# EAGLE board SC_Detect (EAGLE 6.5.0)
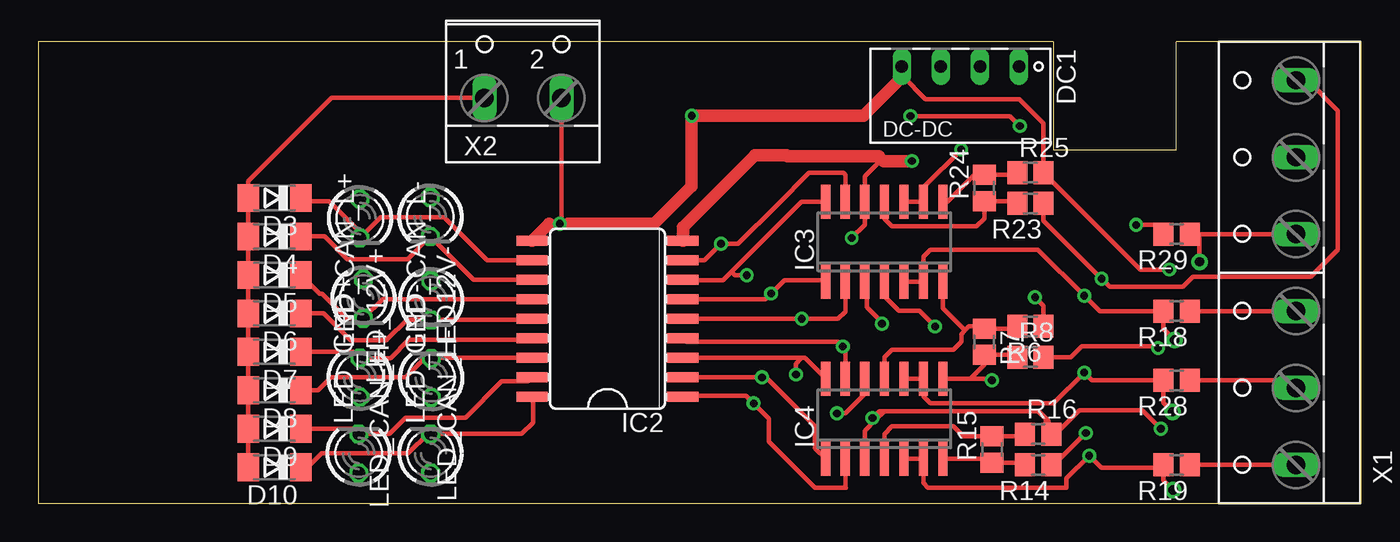
[diagram p0: board, top side]
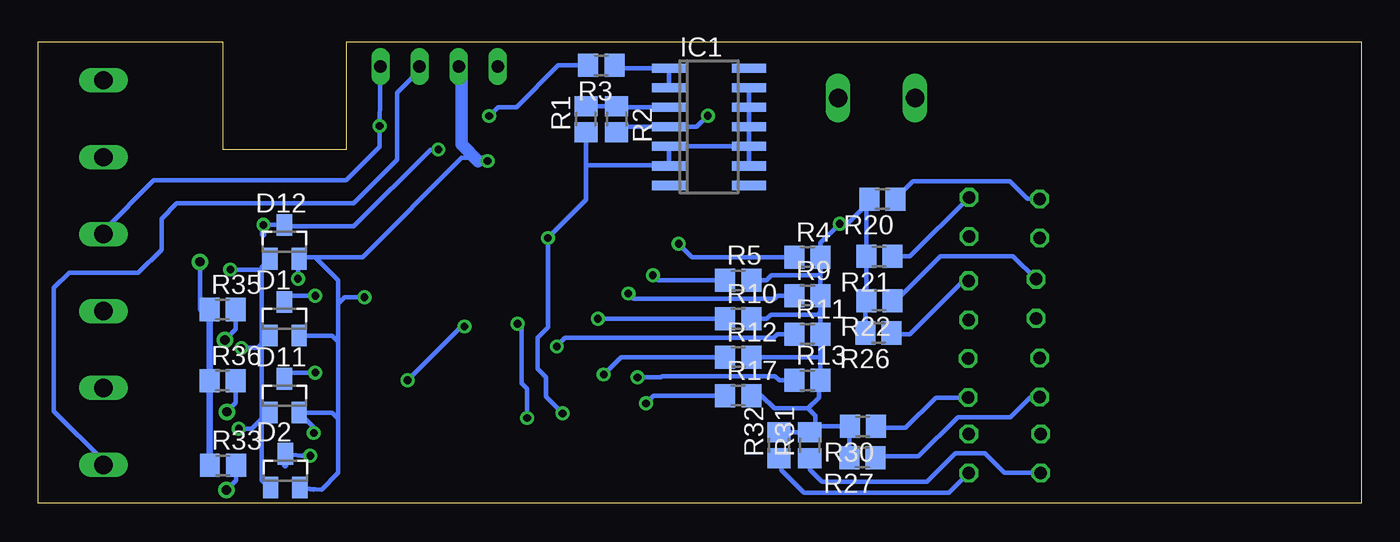
[diagram p1: board, bottom side, seen from below]

Size 86 x 30 mm. Coordinates in mm from the lower left corner, seen from the top.
Outline: 0,30 0,0 86,0 86,30 74,30 74,23 66,23 66,30 0,30
Copper layers (1*16): Top 0.035mm / dielectric 1.5mm / Bottom 0.035mm
Design rules "PCB-POOL Standard": minimum track width 0.15mm, minimum drill 0.3mm, track to track 0.15mm, track to pad 0.15mm, pad to pad 0.15mm, via to via 0.15mm, smd to smd 0.15mm, copper to edge 0.3mm, drill to drill 0.2mm, minimum pad ring 0.2mm, minimum via ring 0.15mm, stop-mask expansion 0.075mm, vias tented up to drill 0mil, thermal gap 0.2mm

## Footprints (pad centres in the part's own frame; a part is rotated, then mirrored left to right if it is on the bottom)
SOT23 = smd 1 x 1.4: 1 -0.95,-1.1; 2 0.95,-1.1; 3 0,1.1
SOD80C = smd 1.4 x 1.8: A 1.7,0; C -1.7,0
NME = drill 0.813 long: 1 0,3.81; 2 0,1.27; 3 0,-1.27; 4 0,-3.81
SO14 = smd 0.6 x 2.2: 1 -3.81,-2.6; 2 -2.54,-2.6; 3 -1.27,-2.6; 4 0,-2.6; 5 1.27,-2.6; 6 2.54,-2.6; 7 3.81,-2.6; 8 3.81,2.6; 9 2.54,2.6; 10 1.27,2.6; 11 0,2.6; 12 -1.27,2.6; 13 -2.54,2.6; 14 -3.81,2.6
SO18L = smd 0.66 x 2.032: 1 -5.08,-4.902; 2 -3.81,-4.902; 3 -2.54,-4.902; 4 -1.27,-4.902; 5 0,-4.902; 6 1.27,-4.902; 7 2.54,-4.902; 8 3.81,-4.902; 9 5.08,-4.902; 10 5.08,4.902; 11 3.81,4.902; 12 2.54,4.902; 13 1.27,4.902; 14 0,4.902; 15 -1.27,4.902; 16 -2.54,4.902; 17 -3.81,4.902; 18 -5.08,4.902
LED3MM = drill 0.813 octagon: A -1.27,0; K 1.27,0
R0805 = smd 1.3 x 1.5: 1 -0.85,0; 2 0.85,0
W237-136 = drill 1.194 long: 1 -12.5,-1.27; 2 -7.5,-1.27; 3 -2.5,-1.27; 4 2.5,-1.27; 5 7.5,-1.27; 6 12.5,-1.27
W237-102 = drill 1.194 long: 1 -2.5,-1.27; 2 2.5,-1.27

## Placement (x,y rotation side)
D1  BAT54S SMD  [SOT23]  70,12 0 bottom
D2  BAT54S SMD  [SOT23]  69.95,2.12 0 bottom
D3  1N4148  [SOD80C]  15.35,19.85 180 top
D4  1N4148  [SOD80C]  15.35,17.35 180 top
D5  1N4148  [SOD80C]  15.35,14.85 180 top
D6  1N4148  [SOD80C]  15.35,12.35 180 top
D7  1N4148  [SOD80C]  15.35,9.85 180 top
D8  1N4148  [SOD80C]  15.35,7.35 180 top
D9  1N4148  [SOD80C]  15.35,4.85 180 top
D10  1N4148  [SOD80C]  15.35,2.35 180 top
D11  BAT54S SMD  [SOT23]  70,7 0 bottom
D12  BAT54S SMD  [SOT23]  70,17 0 bottom
DC1  12V/12V  [NME]  59.95,28.4 270 top
IC1  LM324D  [SO14]  42.4,24.48 270 bottom
IC2  [SO18L]  37,12 90 top
IC3  LM339D  [SO14]  55,17 0 top
IC4  LM339D  [SO14]  55,5.5 0 top
LED12V-  LED_3MM_ST_RT  [LED3MM]  25.48,18.62 270 top
LED_12V+  LED_3MM_ST_RT  [LED3MM]  20.9,18.52 270 top
LED_CAN_H+  LED_3MM_ST_RT  [LED3MM]  21.12,13.3 270 top
LED_CAN_H-  LED_3MM_ST_RT  [LED3MM]  25.52,13.2 270 top
LED_CAN_L+  LED_3MM_ST_RT  [LED3MM]  20.9,8.18 90 top
LED_CAN_L-  LED_3MM_ST_RT  [LED3MM]  25.55,8.15 90 top
LED_GND+  LED_3MM_ST_RT  [LED3MM]  20.82,3.25 90 top
LED_GND-  LED_3MM_ST_RT  [LED3MM]  25.5,3.25 90 top
R1  4k7  [R0805]  50.4,24.98 90 bottom
R2  18k  [R0805]  48.4,24.98 270 bottom
R3  100k  [R0805]  49.4,28.48 180 bottom
R4  10k  [R0805]  36,16 0 bottom
R5  10k  [R0805]  40.5,14.5 0 bottom
R6  3k9  [R0805]  64.5,11.5 180 top
R7  10k  [R0805]  61.5,10.5 270 top
R8  10k  [R0805]  64.5,9.5 0 top
R9  10k  [R0805]  36,13.5 0 bottom
R10  10k  [R0805]  40.5,12 0 bottom
R11  10k  [R0805]  36,11 0 bottom
R12  10k  [R0805]  40.5,9.5 0 bottom
R13  10k  [R0805]  36,8 0 bottom
R14  15k  [R0805]  65,2.5 180 top
R15  3k9  [R0805]  62,3.5 90 top
R16  4k7  [R0805]  65,4.5 0 top
R17  10k  [R0805]  40.5,7 0 bottom
R18  100k  [R0805]  74,12.5 180 top
R19  100k  [R0805]  74,2.5 180 top
R20  2k7  [R0805]  31.12,19.77 180 bottom
R21  2k7  [R0805]  31.32,16.05 180 bottom
R22  2k7  [R0805]  31.32,13.18 180 bottom
R23  3k9  [R0805]  64.5,19.5 180 top
R24  2k2  [R0805]  61.5,20.5 90 top
R25  18k  [R0805]  64.5,21.5 0 top
R26  2k7  [R0805]  31.38,11.07 180 bottom
R27  2k7  [R0805]  32.42,2.98 180 bottom
R28  100k  [R0805]  74,8 180 top
R29  100k  [R0805]  74,17.5 180 top
R30  2k7  [R0805]  32.4,5 180 bottom
R31  2k7  [R0805]  35.85,3.77 90 bottom
R32  2k7  [R0805]  37.85,3.77 90 bottom
R33  100k  [R0805]  74,2.48 0 bottom
R35  100k  [R0805]  74.03,12.6 0 bottom
R36  100k  [R0805]  74.03,7.97 0 bottom
X1  [W237-136]  80.5,15 90 top
X2  [W237-102]  31.5,27.62 0 top

## Library data of the parts
D1-D12 = diode
DC1 = dc-dc-converter
IC1 IC3 IC4 = linear
IC2 = uln-udn
LED12V- LED_12V+ LED_CAN_H+ LED_CAN_H- LED_CAN_L+ LED_CAN_L- LED_GND+ LED_GND- = led
R1-R33 R35 R36 = rcl
X1 X2 = con-wago-500

## Nets
1,96V: IC3.7 IC4.11 R6.2 R7.1
1,941V: IC3.11 R23.2 R24.1
2,484V: IC1.3 R1.2 R2.1
3,04V: IC3.8 R24.2 R25.1
3,98V: IC3.4 IC4.8 R7.2 R8.1
7,62V: IC4.7 R14.2 R15.1
9,61V: IC4.4 R15.2 R16.1
12V+: IC2.1 IC4.2 R17.1
12V+1: D10.C IC2.18 LED_GND-.K
12V-: IC2.2 IC4.1 R13.1
+12V: DC1.2 R19.1 X1.1
BUZZER: D3.A D4.A D5.A D6.A D7.A D8.A D9.A D10.A X2.1
CAN_H: R28.1 X1.2
CAN_H+: IC2.3 IC4.14 R12.1
CAN_H-: IC2.4 IC4.13 R11.1
CAN_L: R18.1 X1.3
CAN_L+: IC2.5 IC3.2 R10.1
CAN_L-: IC2.6 IC3.1 R9.1
GND: DC1.1 R3.2 R29.1 R33.1 R35.1 R36.1 X1.4
GND+: IC2.7 IC3.14 R5.1
GND-: IC2.8 IC3.13 R4.1
GNDINT: D1.2 D2.2 D11.2 D12.2 DC1.3 IC1.5 IC1.6 IC1.9 IC1.10 IC1.11 IC1.12 IC1.13 IC2.9 IC3.12 IC4.12 R1.1 R6.1 R14.1 R23.1 X1.6
N$1: IC1.1 IC1.2 R3.1
N$2: LED_GND-.A R32.1
N$3: LED_GND+.A R31.1
N$4: LED_CAN_L-.A R30.1
N$5: LED_CAN_L+.A R27.1
N$6: LED_CAN_H-.A R26.1
N$8: LED_CAN_H+.A R22.1
N$9: LED12V-.A R21.1
N$10: D12.3 IC3.9 IC3.10 R29.2
N$11: D11.3 IC4.9 IC4.10 R28.2 R36.2
N$12: LED_12V+.A R20.1
N$14: D3.C IC2.11 LED_12V+.K
N$15: D4.C IC2.12 LED12V-.K
N$16: D2.3 IC4.5 IC4.6 R19.2 R33.2
N$17: D5.C IC2.13 LED_CAN_H+.K
N$18: D6.C IC2.14 LED_CAN_H-.K
N$19: D7.C IC2.15 LED_CAN_L+.K
N$20: D8.C IC2.16 LED_CAN_L-.K
N$21: D9.C IC2.17 LED_GND+.K
N$23: D1.3 IC3.5 IC3.6 R18.2 R35.2
VCCINT: D1.1 D2.1 D11.1 D12.1 DC1.4 IC1.4 IC2.10 IC3.3 IC4.3 R2.2 R4.2 R5.2 R8.2 R9.2 R10.2 R11.2 R12.2 R13.2 R16.2 R17.2 R20.2 R21.2 R22.2 R25.2 R26.2 R27.2 R30.2 R31.2 R32.2 X2.2

## Tracks (layer width: path | path; a pad name or v marks a point on that pad's centre or on a via)
1,96V
  Top 0.305: R6.2 63.5,11.35 R7.1 61.35,11.5 60.5,11.5 60.25,11.25 | IC4.11 55,9.5 55.5,10 59.5,10 60,10.5 60,11 60.25,11.25 | IC3.7 58.81,12.69 60.25,11.25
1,941V
  Top 0.305: IC3.11 55,18.5 55.5,18 61,18 61.5,18.5 R24.1 63.5,19.65 R23.2
2,484V
  Bottom 0.305: IC1.3 48.32,25.75 R2.1 R1.2
3,04V
  Top 0.305: IC3.8 59.1,19.6 61,21.5 61.35,21.5 R24.2 63.5,21.35 R25.1
3,98V  (via drill 0.5 pad 0.3)
  Top 0.305: R8.1 63.5,9.65 R7.2 61.5,9 60.6,8.1 IC4.8 61.9,8.1 v62,8 | IC3.4 55,13.47 55.95,12.53 57.27,12.53 v58.3,11.5
  Bottom 0.305: v58.3,11.5 58.5,11.5 v62,8
7,62V
  Top 0.305: R14.2 64,2.65 R15.1 61.75,2.9 IC4.7
9,61V
  Top 0.305: R16.1 64,4.35 R15.2 60.15,4.35 59.5,5 55.5,5 55,4.5 IC4.4
12V+  (via drill 0.5 pad 0.3)
  Top 0.305: IC4.2 52.46,1.04 52.5,1 50.5,1 47.5,4 47.5,5.5 46.75,6.25 | 46.75,6.25 v46.5,6.5 | v46.5,6.5 46,7 41.98,7 IC2.1 | v46.5,6.5 46.75,6.25
  Bottom 0.305: R17.1 46,7 v46.5,6.5
12V+1
  Top 0.305: IC2.18 32.15,6.87 32.15,5.25 31.42,4.52 LED_GND-.K 25.32,4.52 24.05,3.25 18.4,3.25 17.5,2.35 D10.C
12V-  (via drill 0.5 pad 0.3)
  Top 0.305: IC2.2 v47.05,8.19 | v47.05,8.19 47.31,8.19 | 47.31,8.19 47.55,7.95 | 47.55,7.95 50.5,5 50.5,3.59 IC4.1 | v47.05,8.19 47.31,8.19 | 47.31,8.19 47.55,7.95
  Bottom 0.305: R13.1 37.83,8 38.1,8.28 45.44,8.28 45.52,8.19 v47.05,8.19
+12V
  Top 0.305: R19.1 81.5,2.5 X1.1
  Bottom 0.305: X1.1 81.77,2.77 85,6 85,14 84,15 79.5,15 78,16.5 78,18.5 77,19.5 65.5,19.5 62.67,22.32 62.67,26.68 61.27,28.08 DC1.2
BUZZER
  Top 0.305: D10.A D9.A D8.A D7.A D6.A D5.A | D5.A 13.65,15.2 13.8,15.35 13.8,15 D5.A | D5.A 13.65,16.77 13.62,16.8 13.62,17.32 D4.A D3.A 13.65,20.95 19.05,26.35 X2.1
CAN_H
  Top 0.305: R28.1 81.5,8 X1.2
CAN_H+  (via drill 0.5 pad 0.3)
  Top 0.305: IC2.3 49.62,9.46 | 49.62,9.46 49.83,9.46 IC4.14 | v49.25,8.38 49.25,9.09 49.62,9.46
  Bottom 0.305: R12.1 48.12,9.5 v49.25,8.38
CAN_H-  (via drill 0.5 pad 0.3)
  Top 0.305: IC4.13 52.46,10.04 v52.3,10.2 | v52.3,10.2 52.06,10.44 | 52.06,10.44 52,10.5 42.13,10.5 IC2.4 | v52.3,10.2 52.06,10.44
  Bottom 0.305: R11.1 37.95,11 38.2,10.75 51.75,10.75 v52.3,10.2
CAN_L
  Top 0.305: R18.1 81.5,12.5 X1.3
CAN_L+  (via drill 0.5 pad 0.3)
  Top 0.305: IC3.2 52.46,12.46 52,12 50.05,12 | 50.05,12 v49.62,12 | v49.62,12 IC2.5 | v49.62,12 50.05,12
  Bottom 0.305: R10.1 v49.62,12
CAN_L-  (via drill 0.5 pad 0.3)
  Top 0.305: IC2.6 47.27,13.27 v47.64,13.64 | v47.64,13.64 47.79,13.79 | 47.79,13.79 48.5,14.5 51.09,14.5 IC3.1 | v47.64,13.64 47.79,13.79
  Bottom 0.305: R9.1 37.95,13.5 38.15,13.3 47.3,13.3 v47.64,13.64
GND  (via drill 0.5 pad 0.3, 0.6)
  Top 0.305: R29.1 75.47,17.5 | 75.47,17.5 81.5,17.5 X1.4 | v56.7,25.18 63.16,25.18 v63.81,24.52 | v75.5,15.7 75.47,15.7 75.47,17.5
  Bottom 0.305: 63.81,24.25 63.81,23.19 66,21 78.5,21 81.77,17.73 X1.4 | 63.81,24.25 v63.81,24.52 | v63.81,24.52 DC1.1 | R3.2 52.2,28.48 54.92,25.75 56.12,25.75 v56.7,25.18 | v63.81,24.52 63.81,24.25 | R35.1 75.5,12.6 v75.5,15.7
  Bottom 0.406: R33.1 74.88,2.48 R36.1 R35.1 74.85,12.6
GND+  (via drill 0.5 pad 0.3)
  Top 0.305: IC3.14 49.6,19.6 45.06,15.06 | 45.06,15.06 44.5,14.5 41.94,14.5 IC2.7 | v46.05,14.82 45.3,14.82 45.06,15.06
  Bottom 0.305: R5.1 45.73,14.5 v46.05,14.82
GND-  (via drill 0.5 pad 0.3)
  Top 0.305: IC2.8 43.31,15.81 44.34,16.84 | 44.34,16.84 v44.38,16.88 | 52.5,19.64 IC3.13 52.46,21.36 52.35,21.48 50.1,21.48 48.05,19.43 45.5,16.88 v44.38,16.88 | v44.38,16.88 44.34,16.84
  Bottom 0.305: R4.1 43.5,16 v44.38,16.88
GNDINT  (via drill 0.5 pad 0.3)
  Top 0.305: v52.88,17.25 53.73,18.11 IC3.12 53.73,21.25 54.73,22.25 54.98,22.25 54.65,22.57 | v51.92,5.85 52.48,5.85 53.77,7.15 53.77,8.05 IC4.12 | R14.1 66.03,2.5 v68.1,4.58 | R23.1 65.35,18.38 v69.12,14.6 69.65,14.07 74.42,14.07 75.08,14.72 82.72,14.72 84.5,16.5 84.5,25.52 82.53,27.5 82.22,27.5 X1.6 | R6.1 65.35,12.85 v64.8,13.4 | 56.67,22.25 v56.8,22.25 56.67,22.25
  Top 0.813: 54.98,22.25 56.67,22.25 | 54.65,22.57 48.7,22.57 48.65,22.62 46.58,22.62 41.9,17.95 IC2.9
  Bottom 0.305: IC1.5 IC1.6 | IC1.5 45,21.98 50.4,21.98 | 50.4,21.98 R1.1 | IC1.5 IC1.10 | IC1.9 IC1.10 | IC1.10 IC1.11 IC1.12 IC1.13 | 68.1,0.9 D2.2 67.6,0.9 66.5,2 66.5,5.5 | 66.5,5.5 66.5,10.5 | 66.5,10.5 66.5,12.97 | 66.5,12.97 66.5,14.5 68,16 | 68,16 68.95,16 D12.2 69.12,15.82 v69.12,14.6 | D1.2 66.9,10.9 66.5,10.5 | 66.5,5.5 66.9,5.9 D11.2 68.1,4.95 v68.1,4.58 | v51.92,5.85 53,6.92 53,8.2 53.55,8.75 53.55,10.78 52.88,11.45 v52.88,17.25 50.4,19.73 50.4,21.98 | 68,16 64.92,16 58.48,22.45 57,22.45 v56.8,22.25 57.4,22.25 | 58.5,28.27 DC1.3 | v64.8,13.4 66.08,13.4 66.5,12.97
  Bottom 0.813: 57.4,22.25 58.5,23.35 58.5,28.27
N$1
  Bottom 0.305: R3.1 48.55,28.29 IC1.1 IC1.2
N$2
  Bottom 0.305: R32.1 37.77,2.92 37.7,2.85 37.7,2.15 36.23,0.68 26.8,0.68 LED_GND-.A
N$3
  Bottom 0.305: LED_GND+.A 23.18,1.98 24.45,3.25 26.38,3.25 28.23,1.4 35.05,1.4 35.85,2.2 R31.1
N$4
  Bottom 0.305: LED_CAN_L-.A 27.64,6.88 29.62,4.9 31.45,4.9 R30.1
N$5
  Bottom 0.305: LED_CAN_L+.A 21.5,6.91 22.8,5.6 26.23,5.6 28.77,3.05 31.5,3.05 R27.1
N$6
  Bottom 0.305: LED_CAN_H-.A 25.86,14.47 29.32,11 30.45,11 R26.1
N$8
  Bottom 0.305: R22.1 30.25,13.18 27.35,16.07 22.63,16.07 LED_CAN_H+.A
N$9
  Bottom 0.305: R21.1 29.32,16.05 LED12V-.A
N$10  (via drill 0.5 pad 0.3)
  Top 0.305: IC3.10 IC3.9 57.54,20.54 v60,23 | R29.2 72.55,18.1 v71.38,18.1
  Bottom 0.305: v60,23 60.5,23 65.5,18 68,18 69.9,18 D12.3 v71.38,18.1
  Bottom 0.406: 71.38,17.48 v71.38,18.1
N$11  (via drill 0.5 pad 0.3, 0.6)
  Top 0.305: IC4.10 IC4.9 57.54,6.96 58,6.5 66,6.5 v68,8.5 68.5,8 R28.2 73.15,6.55 v73.75,5.95
  Bottom 0.305: v68,8.5 69.6,8.5 D11.3 | R36.2 73.17,6.53 v73.75,5.95
  Bottom 0.406: 70,7.97 D11.3
N$12
  Bottom 0.305: LED_12V+.A 21.7,19.8 22.82,20.93 29.12,20.93 R20.1
N$14
  Top 0.305: IC2.11 29.16,15.81 26.38,18.6 22.25,18.6 LED_12V+.K 20.9,17.62 18.9,19.62 17.27,19.62 D3.C
N$15
  Top 0.305: IC2.12 28.29,14.54 LED12V-.K 24,15.88 20.07,15.88 18.6,17.35 D4.C
N$16  (via drill 0.5 pad 0.3, 0.6)
  Top 0.305: IC4.5 IC4.6 57.54,1.33 57.85,1.02 66.85,1.02 66.85,1.62 v68.33,3.1 69.1,2.33 72.97,2.33 R19.2 73.15,1.5 v73.78,0.88
  Bottom 0.305: D2.3 68.92,3.1 v68.33,3.1 | R33.2 73.15,1.5 v73.78,0.88
  Bottom 0.406: 69.95,2.48 D2.3
N$17
  Top 0.305: IC2.13 22.36,13.27 LED_CAN_H+.K 20.05,12.03 18.45,13.62 18.27,13.62 D5.C
N$18
  Top 0.305: IC2.14 32.03,11.93 LED_CAN_H-.K 23.95,11.93 22.65,10.62 22.62,10.6 20.3,10.6 18.55,12.35 D6.C
N$19
  Top 0.305: IC2.15 31.99,10.62 24.07,10.62 22.89,9.45 LED_CAN_L+.K 20.5,9.85 D7.C
N$20
  Top 0.305: IC2.16 25.59,9.46 LED_CAN_L-.K 25.09,9.42 23.88,8.2 19.02,8.2 18.18,7.35 D8.C
N$21
  Top 0.305: IC2.17 31.83,7.92 30.12,7.92 27.77,5.58 23.88,5.58 22.82,4.52 LED_GND+.K 20.5,4.85 D9.C
N$23  (via drill 0.5 pad 0.3, 0.6)
  Top 0.305: IC3.5 IC3.6 57.54,16.04 58,16.5 65,16.5 v68,13.5 69,12.5 R18.2 73.15,11.35 v73.88,10.62
  Bottom 0.305: v68,13.5 69.6,13.5 D1.3 | R35.2 73.17,11.32 v73.88,10.62
  Bottom 0.406: 70,12.6 D1.3
VCCINT  (via drill 0.5 pad 0.3)
  Top 0.305: IC4.3 53.73,4.73 54.5,5.5 55,6 | 55,6 65,6 | 65,6 65.5,5.5 65.5,4.85 R16.2 | 55,6 54.67,6 v54.23,5.55 | v54.85,11.68 54.85,11.78 53.88,12.75 53.88,14.26 IC3.3 | R8.2 67.12,9.5 67.85,10.22 72.67,10.22 v72.8,10.1 | 65,6 65.05,6 65.67,5.38 65.67,4.67 R16.2 | 72.88,4.75 v72.97,4.85 71.78,6.05 67.67,6.05 66.12,4.5 R16.2 | v73.53,15.2 71.65,15.2 R25.2 65.35,23.18 65.35,24.7 63.77,26.27 57.67,26.27 56.2,27.75 56.2,28.49 | v33.9,18.18 34.42,18.18 v33.9,18.18 | v33.9,18.18 33.19,18.18 | X2.2 34,18.27 v33.9,18.18
  Top 0.406: 56.2,28.49 56.14,28.49 DC1.4
  Top 0.813: 56.2,27.75 53.65,25.2 v42.48,25.2 42.48,20.62 40.02,18.18 34.42,18.18 | 33.19,18.18 IC2.10
  Bottom 0.305: R2.2 48.4,24.48 IC1.4 43.2,24.48 v42.48,25.2 | D2.1 70.95,0.95 71.5,1.5 71.5,5.5 | 71.5,5.5 71.5,11 | 71.5,11 71.5,15.18 | 71.5,15.18 71.5,15.35 D12.1 | 71.5,11 71.4,10.9 D1.1 71.75,10.1 v72.8,10.1 | D11.1 71.1,5.9 71.39,5.61 | 71.39,5.61 71.5,5.5 | R17.2 38.98,7 38.15,6.17 36.67,6.17 | 36.67,6.17 36.58,6.17 | 36.58,6.17 35.95,6.17 | 35.95,6.17 35.25,6.88 35.25,7.9 R13.2 35.15,9.53 | 35.15,9.53 R11.2 35.15,12.45 | 35.15,12.45 R9.2 35.15,14.7 | 35.15,14.7 R4.2 35.15,16.93 v33.9,18.18 33.4,18.18 31.98,19.6 R20.2 32.17,19.57 R21.2 R22.2 32.23,13.12 R26.2 | R5.2 38.67,14.5 38.35,14.82 35.27,14.82 35.15,14.7 | R10.2 38.65,12 38.38,12.28 35.33,12.28 35.15,12.45 | R12.2 35.17,9.5 35.15,9.53 | v54.23,5.55 54.23,7.45 54.58,7.8 54.58,11.4 v54.85,11.68 | v72.97,4.85 72.15,4.85 71.39,5.61 | v73.53,15.2 73.5,15.18 71.5,15.18 | 36.58,6.17 36.67,6.17 | R27.2 33.27,4.97 R30.2 35.48,5 | 35.48,5 R31.2 R32.2 | 35.48,5 35.48,5.7 35.95,6.17